# Altium PCB xbw.PcbDoc
Units mm, origin at the board's own origin, x right, y up, seen from the top; angles counter-clockwise.
Board outline 80 x 36 mm, 2 copper layers (Top Layer, Bottom Layer); 50 components, 49 nets, 227 pads, 269 vias.
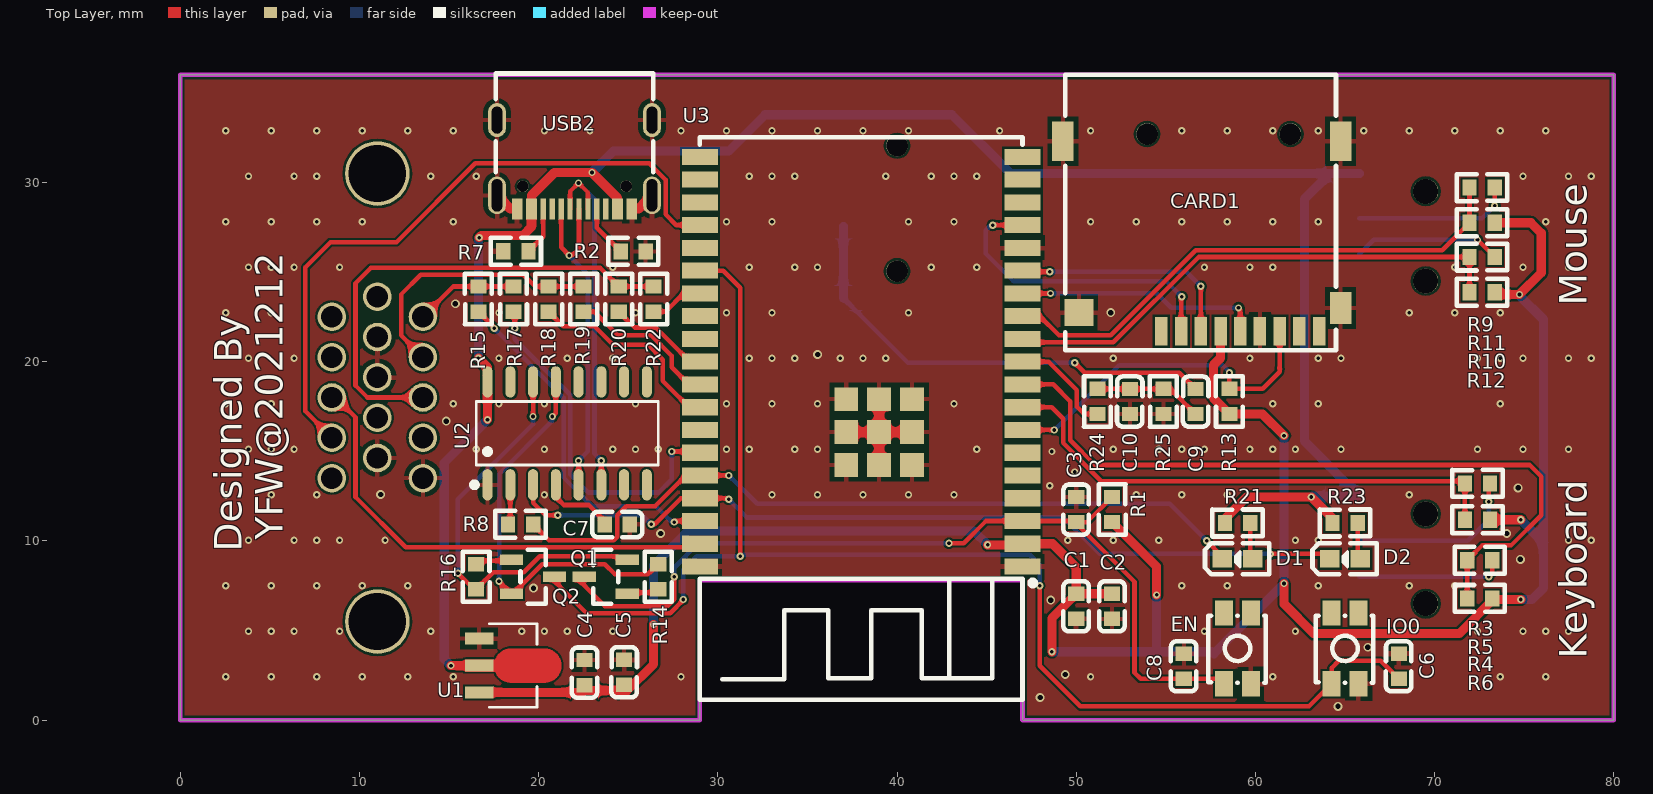
[diagram p0: Top Layer view]
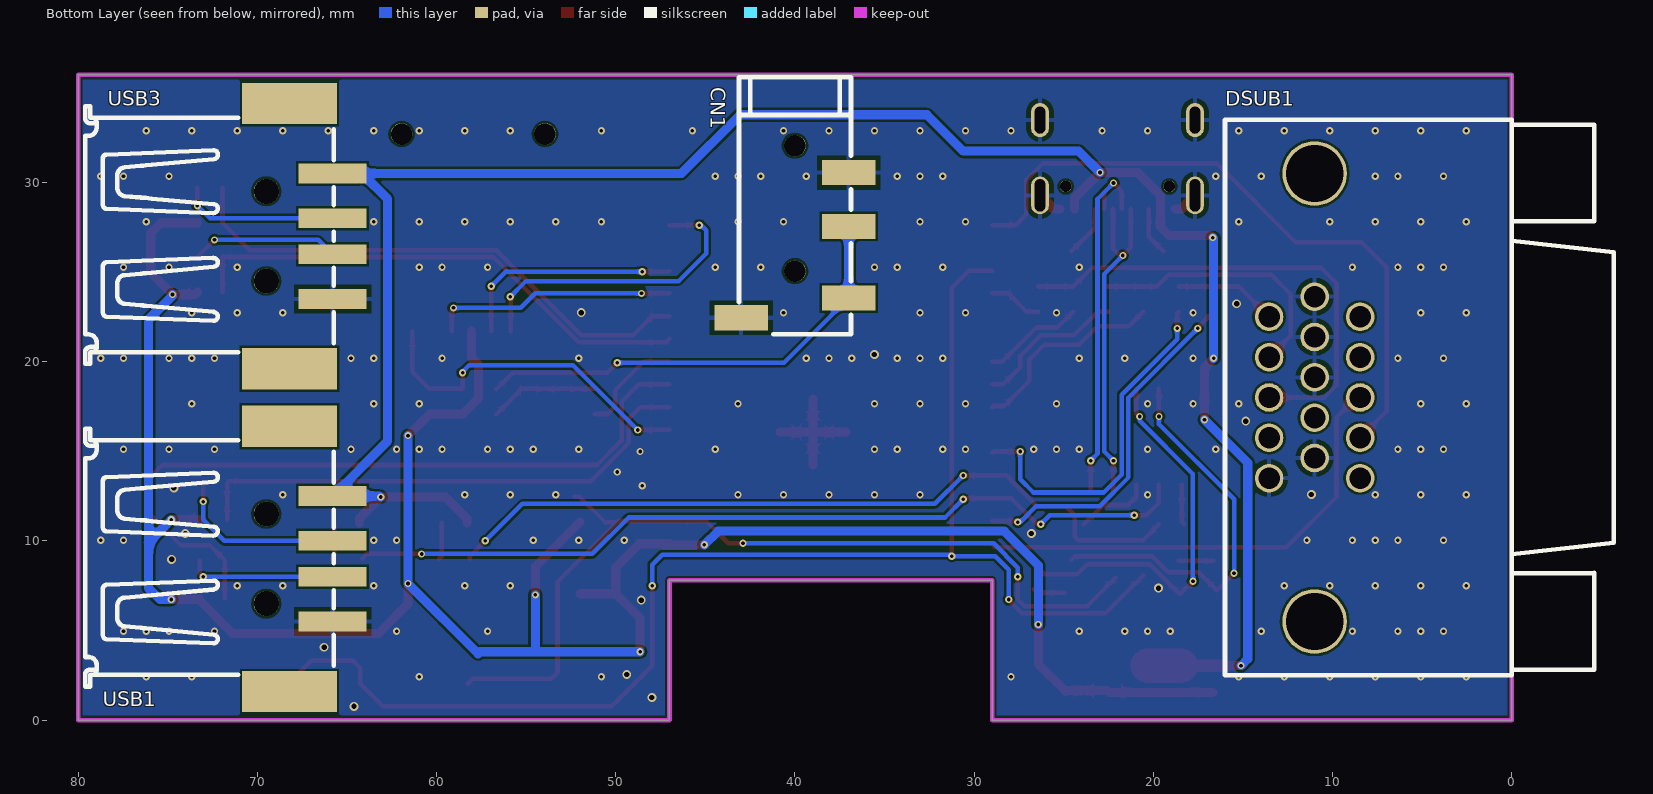
[diagram p1: Bottom Layer view, seen from below]
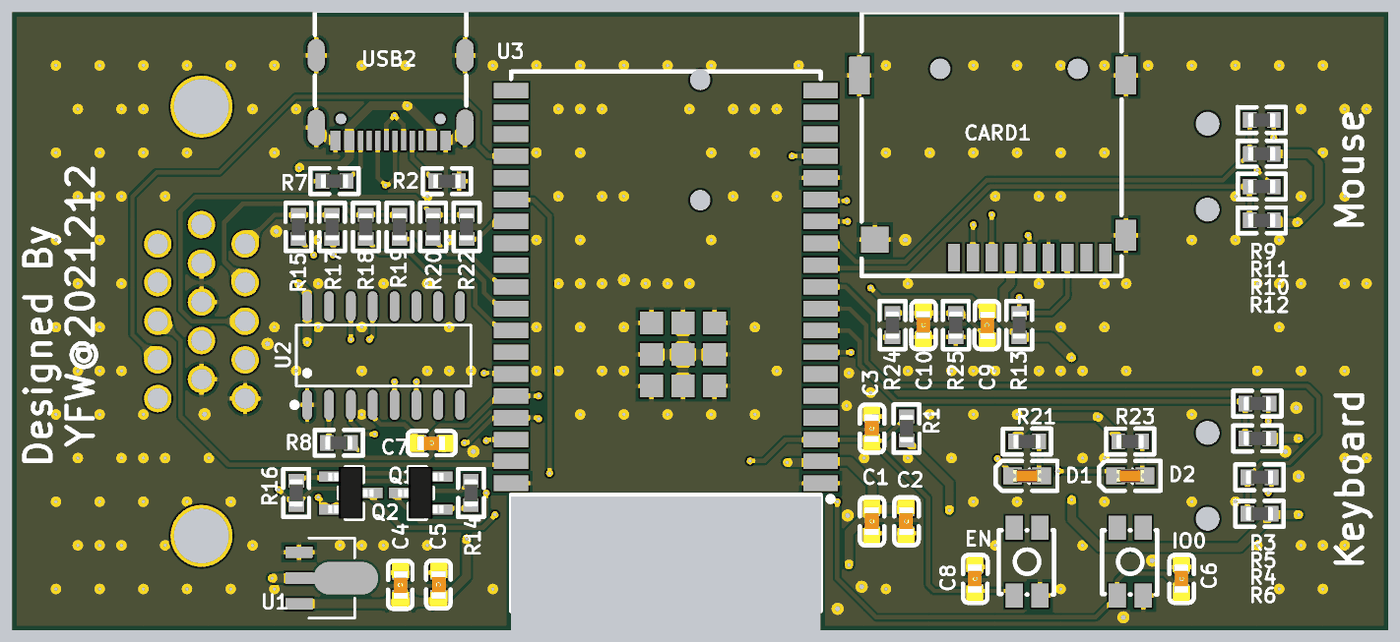
[diagram p2: 3D render of the assembled board from above, using the file's embedded part models]

## Layer stack, top to bottom
Top Solder: solder mask 0.0102, Solder Resist, Dk 3.5
Top Layer: signal copper 0.0356
Dielectric 1: dielectric 0.32, FR-4, Dk 4.8
Bottom Layer: signal copper 0.0356
Bottom Solder: solder mask 0.0102, Solder Resist, Dk 3.5

## Board outline
0,0 0,36 80,36 80,0 47,0 47,7.8 29,7.8 29,0

## Design rules (kind name [scope] priority, off if disabled: settings)
Clearance [All] p1: gap=0.127 ignorepadtopadclearanceinfootprint=FALSE except(0: Arc-Hole Track-Hole SMDPad-Hole THPad-Hole Via-Hole Fill-Hole Poly-Hole Region-Hole Text-Hole)
PolygonConnect [All] p1: thpad.connectstyle=Relief thpad.reliefconductorwidth=0.254 thpad.reliefentries=4 thpad.polygonreliefangle="90 Angle" thpad.airgapwidth=0.254 smdpad.connectstyle=Relief smdpad.reliefconductorwidth=0.254 smdpad.reliefentries=4 smdpad.polygonreliefangle="90 Angle" smdpad.airgapwidth=0.254 via.connectstyle=Direct via.reliefconductorwidth=0.254 via.reliefentries=4 via.polygonreliefangle="90 Angle" via.airgapwidth=0.254
RoutingVias [All] p1: holewidth=0.203 width=0.406 viastyle="Through Hole" minholewidth=0.152 minwidth=0.305 maxholewidth=0.711 maxwidth=1.27
SolderMaskExpansion [All] p1: expansion=0.102
Width [All] p1: maxlimit=1.016 minlimit=0.152 preferedwidth=0.152 minimp=50.000000 maximp=50.000000 favimp=50.000000
30 further rules are at their usual default settings.

## Components (designator, comment, footprint, x,y, rotation, side; value= is the part's Value field where it differs from the comment)
C1 "100nF" C0603 50,6.35 r90 top
C2 "10uF" C0603 52,6.35 r90 top
C3 "10uF" C0603 50,11.75 r90 top
C4 "10uF" C0603 22.549,2.65 r270 top
C5 "100nF" C0603 24.765,2.667 r270 top
C6 "100nF" C0603 68,3 r90 top
C7 "100nF" C0603 24.384,10.922 r180 top
C8 "100nF" C0603 56,3 r90 top locked
C9 "10uF" C0603 56.657,17.776 r270 top
C10 "100nF" C0603 52.993,17.778 r90 top
CARD1 "THD2528-11SD-GF" TF-SMD_THD2528-11SD-GF 57,27 r180 top locked
CN1 "PJ-320D" AUDIO-SMD_PJ-320D 40,26.5 r180 bottom locked
D1 "LED" LED-0603 59,9 r0 top
D2 "LED" LED-0603 65,9 r0 top
DSUB1 "VGA-002" D-SUB-TH_VGA-002 11,18 r90 bottom locked
EN "TS-1071SA-A3B3-D4" KEY-SMD_4P-L3.5-W3.0-P1.40-LS4.6 59,4 r90 top locked (schematic designator SW2)
IO0 "TS-1071SA-A3B3-D4" KEY-SMD_4P-L3.5-W3.0-P1.40-LS4.6 65,4 r90 top (schematic designator SW1)
Q1 "S8050" SOT-23_L2.9-W1.3-P0.95-LS2.4-BR 23.749,8 r0 top
Q2 "S8050" SOT-23_L2.9-W1.3-P0.95-LS2.4-BR 19.685,8 r180 top
R1 "10K" R0603 52,11.75 r90 top
R2 "5.1K" R0603 25.273,26.157 r0 top
R3 "120" R0603 72.39,13.208 r180 top
R4 "120" R0603 72.517,8.917 r180 top
R5 "10K" R0603 72.39,11.176 r0 top
R6 "10K" R0603 72.517,6.791 r180 top
R7 "5.1K" R0603 18.731,26.162 r180 top
R8 "1K" R0603 18.988,10.922 r0 top
R9 "120" R0603 72.644,29.718 r180 top
R10 "120" R0603 72.644,25.842 r180 top
R11 "10K" R0603 72.644,27.751 r0 top
R12 "10K" R0603 72.644,23.876 r180 top
R13 "10K" R0603 58.547,17.78 r90 top
R14 "12K" R0603 26.67,8 r270 top
R15 "400" R0603 16.637,23.495 r270 top
R16 "12K" R0603 16.51,8 r90 top
R17 "800" R0603 18.593,23.495 r270 top
R18 "400" R0603 20.554,23.495 r270 top
R19 "800" R0603 22.51,23.495 r270 top
R20 "400" R0603 24.465,23.495 r270 top
R21 "1K" R0603 59,11 r180 top
R22 "800" R0603 26.416,23.495 r270 top
R23 "1K" R0603 65,11 r180 top
R24 "270" R0603 51.181,17.78 r270 top
R25 "150" R0603 54.862,17.78 r270 top
U1 "ME6211A33PG-N" SOT-89_L4.5-W2.5-P1.50-LS4.2-BR 18.034,3.048 r180 top
U2 "CH340C" SOP-16_L10.0-W3.9-P1.27-LS6.0-BL 21.59,16 r0 top
U3 "ESP32-WROVER-E(4MB)_C701347" WIFI-SMD_ESP32-WROVER-E 38,20 r180 top locked
USB1 "U-USBAM04P-F000" USB-A-SMD_U-USBAM04P-F000 67,9 r270 bottom locked
USB2 "TYPEC-304J-BCP16" USB-C-SMD_TYPEC-304J-BCP16 22,31 r180 top locked
USB3 "U-USBAM04P-F000" USB-A-SMD_U-USBAM04P-F000 67,27 r270 bottom locked

## Footprints (in the part's own frame and the unit in brackets; to place one, negate y for a bottom-side part, rotate by r counter-clockwise, add the part's x,y. Pads: shape width x height; smd on the part's side, far side on the other; paste and mask are expansions set on the pad)
AUDIO-SMD_PJ-320D [mm]
  rect 3x1.4 smd: 1(-3,-4.05) 2(3,4.05) 3(3,1.05) 4(3,-2.95)
  round 1.2 hole 1.2 unplated: ""(0,-1.45) ""(0,5.55)
  silkscreen extent -3.12,-4.98 3.13,9.37
C0603 [mm]
  rect 0.8x0.9 smd: 1(-0.7,0) 2(0.7,0)
  silkscreen extent -1.4,-0.7 1.4,0.72, body extent -1.29,-0.47 1.31,0.53, height 0.89
D-SUB-TH_VGA-002 [mil]
  round 62.7 hole 47: 1(177.16,100) 2(88.58,100) 3(0,100) 4(-88.58,100) 5(-177.16,100) 6(221.46,0) 7(132.87,0) 8(44.29,0) 9(-44.29,0) 10(-132.87,0) 11(177.16,-100) 12(88.58,-100) 13(0,-100) 14(-88.58,-100) 15(-177.16,-100)
  round 141.7 hole 126: 16(492.13,0) 17(-492.13,0)
  silkscreen extent -610,-657 610,197
KEY-SMD_4P-L3.5-W3.0-P1.40-LS4.6 [mm]
  rect 1.4x1 smd: 1(-1.975,0.75) 2(1.975,0.75) 3(-1.975,-0.75) 4(1.975,-0.75)
  silkscreen extent -1.91,-1.57 1.83,1.64
LED-0603 [mil]
  rect 43x39 smd: 1(33.5,0) 2(-33.5,0)
  silkscreen extent -72,-34 70,34, body extent -32,-16 32,16, height 24
R0603 [mm]
  rect 0.8x0.9 smd: 1(-0.7,0) 2(0.7,0)
  silkscreen extent -1.4,-0.75 1.4,0.76, body extent -0.8,-0.4 0.8,0.4, height 0.38
SOP-16_L10.0-W3.9-P1.27-LS6.0-BL [mm]
  oval 0.56x1.745 smd: 1(-4.445,-2.873) 2(-3.175,-2.873) 3(-1.905,-2.873) 4(-0.635,-2.873) 5(0.635,-2.873) 6(1.905,-2.873) 7(3.175,-2.873) 8(4.445,-2.873) 9(4.445,2.873) 10(3.175,2.873) 11(1.905,2.873) 12(0.635,2.873) 13(-0.635,2.873) 14(-1.905,2.873) 15(-3.175,2.873) 16(-4.445,2.873)
  silkscreen extent -5.33,-3.02 5.08,1.77
SOT-23_L2.9-W1.3-P0.95-LS2.4-BR [mm]
  rect 1.3x0.6 smd: 1(1.2,-0.95) 2(1.2,0.95) 3(-1.2,0)
  silkscreen extent -0.7,-1.5 0.7,1.5, body extent -1.32,-1.5 1.32,1.5, height 1.08
SOT-89_L4.5-W2.5-P1.50-LS4.2-BR [mm]
  rect 1.575x0.672 smd: 1(1.356,-1.5) 2(1.356,0) 3(1.356,1.5)
  round 0 smd: 2(-1.356,0.009)
  Top Layer region: -2.283,0.959 -0.429,0.959 -0.385,0.958 -0.34,0.955 -0.296,0.949 -0.252,0.942 -0.208,0.933 -0.165,0.921 -0.123,0.908 -0.081,0.893 -0.04,0.875 0,0.856 0.04,0.835 0.078,0.812 0.115,0.788 0.151,0.761 0.185,0.733 0.219,0.704 0.251,0.673 0.281,0.64 0.31,0.606 0.337,0.571 0.362,0.534 0.386,0.497 0.408,0.458 0.428,0.418 0.447,0.339 2.144,0.339 2.144,-0.321 0.447,-0.321 0.428,-0.401 0.408,-0.44 0.386,-0.479 0.362,-0.517 0.337,-0.553 0.31,-0.588 0.281,-0.622 0.251,-0.655 0.219,-0.686 0.185,-0.716 0.151,-0.744 0.115,-0.77 0.078,-0.795 0.04,-0.818 0,-0.839 -0.04,-0.858 -0.081,-0.875 -0.123,-0.89 -0.165,-0.904 -0.208,-0.915 -0.252,-0.925 -0.296,-0.932 -0.34,-0.937 -0.385,-0.94 -0.429,-0.941 -2.283,-0.941 -2.328,-0.94 -2.372,-0.937 -2.416,-0.932 -2.46,-0.925 -2.504,-0.915 -2.547,-0.904 -2.589,-0.89 -2.631,-0.875 -2.672,-0.858 -2.713,-0.839 -2.752,-0.818 -2.79,-0.795 -2.827,-0.77 -2.863,-0.744 -2.898,-0.716 -2.931,-0.686 -2.963,-0.655 -2.993,-0.622 -3.022,-0.588 -3.049,-0.553 -3.075,-0.517 -3.098,-0.479 -3.12,-0.44 -3.141,-0.401 -3.159,-0.36 -3.175,-0.318 -3.189,-0.276 -3.202,-0.233 -3.212,-0.19 -3.22,-0.146 -3.227,-0.102 -3.231,-0.058 -3.233,-0.013 -3.233,0.031 -3.231,0.076 -3.227,0.12 -3.22,0.164 -3.212,0.208 -3.202,0.251 -3.189,0.294 -3.175,0.336 -3.159,0.377 -3.141,0.418 -3.12,0.458 -3.098,0.497 -3.075,0.534 -3.049,0.571 -3.022,0.606 -2.993,0.64 -2.963,0.673 -2.931,0.704 -2.898,0.733 -2.863,0.761 -2.827,0.788 -2.79,0.812 -2.752,0.835 -2.713,0.856 -2.672,0.875 -2.631,0.893 -2.589,0.908 -2.547,0.921 -2.504,0.933 -2.46,0.942 -2.416,0.949 -2.372,0.955 -2.328,0.958
  silkscreen extent -1.87,-2.33 0.78,2.33
TF-SMD_THD2528-11SD-GF [mm]
  rect 0.7x1.6 smd: 1(2.25,5.3) 2(1.15,5.3) 3(0.05,5.3) 4(-1.05,5.3) 5(-2.15,5.3) 6(-3.25,5.3) 7(-4.35,5.3) 8(-5.45,5.3) 9(-6.55,5.3)
  rect 1.2x1.8 smd: 10(-7.75,4)
  rect 1.2x2.2 smd: 11(-7.75,-5.3) 12(7.75,-5.3)
  rect 1.6x1.5 smd: 13(6.85,4.25)
  round 1.2 hole 1.2 unplated: ""(-4.95,-5.7) ""(3.05,-5.7)
  silkscreen extent -7.49,-9 7.62,6.36
USB-A-SMD_U-USBAM04P-F000 [mm]
  rect 1.1x3.8 smd: 1(-3.5,1.2) 2(-1,1.2) 3(1,1.2) 4(3.5,1.2)
  rect 2.3x5.3 smd: SH1(7.4,-1.2) SH2(-7.4,-1.2)
  round 1.4 hole 1.4 unplated: ""(-2.5,-2.5) ""(2.5,-2.5)
  silkscreen extent -7.25,-12.61 7.13,1.27
USB-C-SMD_TYPEC-304J-BCP16 [mm]
  oval 1x2.1 hole 0.6 slot 1.8 at 90 deg: 13(-4.325,1.719) 14(4.325,1.719)
  oval 1x1.9 hole 0.6 slot 1.5 at 90 deg: 15(-4.325,-2.481) 16(4.325,-2.481)
  rect 0.6x1.15 smd: A1B12(-3.2,2.481) A4B9(-2.4,2.481) B1A12(3.2,2.481) B4A9(2.4,2.481)
  rect 0.3x1.15 smd: A5(-1.25,2.481) A6(-0.25,2.481) A7(0.25,2.481) A8(1.25,2.481) B5(1.75,2.481) B6(0.75,2.481) B7(-0.75,2.481) B8(-1.75,2.481)
  round 0.65 hole 0.65 unplated: ""(-2.89,1.219) ""(2.89,1.219)
  silkscreen extent -4.4,-5.08 4.4,0.44
WIFI-SMD_ESP32-WROVER-E [mm]
  rect 2x0.9 smd: 1(-9,11.43) 2(-9,10.16) 3(-9,8.89) 4(-9,7.62) 5(-9,6.35) 6(-9,5.08) 7(-9,3.81) 8(-9,2.54) 9(-9,1.27) 10(-9,0) 11(-9,-1.27) 12(-9,-2.54) 13(-9,-3.81) 14(-9,-5.08) 15(-9,-6.35) 16(-9,-7.62) 17(-9,-8.89) 18(-9,-10.16) 19(-9,-11.43) 20(9,-11.43) 21(9,-10.16) 22(9,-8.89) 23(9,-7.62) 24(9,-6.35) 25(9,-5.08) 26(9,-3.81) 27(9,-2.54) 28(9,-1.27) 29(9,0) 30(9,1.27) 31(9,2.54) 32(9,3.81) 33(9,5.08) 34(9,6.35) 35(9,7.62) 36(9,8.89) 37(9,10.16) 38(9,11.43)
  rect 1.33x1.33 smd: 39(-2.835,5.765) 39(-2.835,2.095) 39(-2.835,3.93) 39(-1,5.765) 39(-1,3.93) 39(-1,2.095) 39(0.835,3.93) 39(0.835,2.095) 39(0.835,5.765)
  silkscreen extent -9.72,-12.53 9,18.87

## Part data
C1 C2 C3 C4 C5 C6 C7 C8 C9 C10: library part CAP_0603, BOM_Manufacturer=YAGEO, BOM_Manufacturer Part=CC0603GRNPO9BN200, BOM_Supplier=LCSC, BOM_Supplier Part=C325469, Contributor=LCSC, nameAlias=Capacitance, spicePre=C, spiceSymbolName=CC0603GRNPO9BN200
CARD1: BOM_JLCPCB Part Class="Extended Part", BOM_Manufacturer=THD, BOM_Manufacturer Part=THD2528-11SD-GF, BOM_Supplier=LCSC, BOM_Supplier Part=C283232, Contributor=LCSC, spicePre=C, spiceSymbolName=THD2528-11SD-GF
CN1: BOM_JLCPCB Part Class="Extended Part", BOM_Manufacturer="SHOU HAN", BOM_Manufacturer Part=PJ-320D, BOM_Supplier=LCSC, BOM_Supplier Part=C431535, Contributor=LCSC, spicePre=C, spiceSymbolName=PJ-320D
D1 D2: library part LED-Y, BOM_Manufacturer Part=?, nameAlias=Model, spicePre=D, spiceSymbolName=LED
DSUB1: BOM_JLCPCB Part Class="Extended Part", BOM_Manufacturer=BOOMELE, BOM_Manufacturer Part=VGA-002, BOM_Supplier=LCSC, BOM_Supplier Part=C138387, spicePre=D, spiceSymbolName=VGA-002
EN IO0: BOM_JLCPCB Part Class="Extended Part", BOM_Manufacturer=Yuandi, BOM_Manufacturer Part=TS-1071SA-A3B3-D4, BOM_Supplier=LCSC, BOM_Supplier Part=C498309, Contributor=LCSC, spicePre=S, spiceSymbolName=TS-1071SA-A3B3-D4
Q1 Q2: BOM_Manufacturer=GreenPower, BOM_Manufacturer Part=S8050, BOM_Supplier=LCSC, BOM_Supplier Part=C414195, Contributor=LCSC, spicePre=Q, spiceSymbolName=S8050_C414195
R1 R2 R3 R4 R5 R6 R7 R8 R9 R10 R11 R12 R13 R14 R15 R16 R17 R18 R19 R20 R21 R22 R23 R24 R25: library part RES_0603, BOM_Manufacturer=LIZ, BOM_Manufacturer Part=CR0603JA0301G, BOM_Supplier=LCSC, BOM_Supplier Part=C101323, nameAlias="Resistance (Ohms)", spicePre=R, spiceSymbolName=CR0603JA0301G
U1: BOM_JLCPCB Part Class="Extended Part", BOM_Manufacturer="Nanjing Micro One Elec", BOM_Manufacturer Part=ME6211A33PG-N, BOM_Supplier=LCSC, BOM_Supplier Part=C236673, Contributor=LCSC, spicePre=U, spiceSymbolName=ME6211A33PG-N
U2: BOM_JLCPCB Part Class="Extended Part", BOM_Manufacturer=WCH, BOM_Manufacturer Part=CH340C, BOM_Supplier=LCSC, BOM_Supplier Part=C84681, spicePre=U, spiceSymbolName=CH340C
U3: BOM_JLCPCB Part Class="Extended Part", BOM_Manufacturer="Espressif Systems", BOM_Manufacturer Part=ESP32-WROVER-E(4MB), BOM_Supplier=LCSC, BOM_Supplier Part=C701347, Contributor=LCSC, spicePre=U, spiceSymbolName=ESP32-WROVER-E(4MB)_C701347
USB1 USB3: BOM_JLCPCB Part Class="Extended Part", BOM_Manufacturer="Shenzhen Cankemeng", BOM_Manufacturer Part=U-USBAM04P-F000, BOM_Supplier=LCSC, BOM_Supplier Part=C386738, Contributor=LCSC, spicePre=U, spiceSymbolName=U-USBAM04P-F000
USB2: BOM_JLCPCB Part Class="Extended Part", BOM_Manufacturer=XUNPU(讯普, BOM_Manufacturer Part=TYPEC-304J-BCP16, BOM_Supplier=LCSC, BOM_Supplier Part=C2835315, Contributor=LCSC, spicePre=U, spiceSymbolName=TYPEC-304J-BCP16

## Via types
v1: diameter 0.406, hole 0.203, Top Layer to Bottom Layer, 254 vias
v2: diameter 0.5, hole 0.3, Top Layer to Bottom Layer, 15 vias

## Nets (pads, with @x,y where several pads share a name; then routed paths per layer and width w, separated by ;. In a path a pad name is that pad's centre, name@x,y a point inside that pad or via, vN(x,y) a via of type N, cw(c..) or ccw(c..) an arc to the next point about the centre after c; other vN are vias at no path point)
+3V3: C1.2 C2.2 C4.2 C5.2 CARD1.4 R1.1 R5.2 R6.1 R11.2 R12.1 R13.1 U1.3 U3.2 | length 134.5
  Top Layer w0.254: 22.447,1.548 C4.2@22.549,1.65
  Top Layer w0.508: U1.3 22.447,1.548 ; C4.2@22.549,1.65 C5.2@24.891,1.65 ; C5.2@24.892,1.597 26.416,3.121 v1(26.416,5.334) ; v1(45.052,9.779) U3.2@47.371,9.779 ; U3.2 48.672,9.84 50,8.512 C1.2 C2.2 ; v1(48.641,3.81) 48.641,5.679 49.169,6.207 ; 49.169,6.208 C1.2@49.784,6.823 ; R1.1 54.483,8.567 v1(54.483,6.985) ; CARD1.4 58.05,20.204 57.658,19.812 57.658,17.969 R13.1 60.39,17.08 v1(61.595,15.875) ; v1(61.595,7.62) 61.595,6.477 63.246,4.826 71.374,4.826 R6.1@73.279,6.731 ; R5.2 v1(74.803,11.176) ; R6.1 73.277,6.731 R6.1@73.279,6.731 ; R12.1 73.471,23.749 v1(74.73,23.749) 75.946,24.965 75.946,27.178 75.373,27.751 R11.2 ; v1(74.803,6.731) R6.1@73.279,6.731
  Bottom Layer w0.508: v1(26.416,5.334) 26.416,8.636 28.321,10.541 44.29,10.541 v1(45.052,9.779) ; v1(48.641,3.81) 54.61,3.81 ; v1(54.483,6.985) 54.483,3.937 54.61,3.81 ; v1(61.595,15.875) v1(61.595,7.62) 57.675,3.7 57.565,3.81 54.61,3.81 ; v1(74.73,23.749) 74.73,23.695 76.073,22.352 76.073,9.906 ; v1(74.803,6.731) 75.438,6.731 76.073,7.366 76.073,9.906 ; v1(74.803,11.176) 76.073,9.906
AUDIO: C9.1 CN1.3 CN1.4 | length 25.8
  Top Layer w0.254: v1(49.911,19.939) 50.47,19.38 55.753,19.38 C9.1
  Bottom Layer w0.254: CN1.4 40.611,19.939 v1(49.911,19.939)
  Bottom Layer w0.508: CN1.4 CN1.3
BLUE0: R22.2 U3.26 | length 3
  Top Layer w0.254: R22.2 27.074,22.795 28.089,23.81 U3.26
BLUE1: R20.2 U3.29 | length 5.7
  Top Layer w0.254: R20.2 25.354,21.906 26.542,21.906 28.448,20 U3.29
DTR: Q2.2 R14.1 U2.13 | length 22.4
  Top Layer w0.254: v1(17.788,7.747) Q2.2 18.543,7.05 20.193,8.7 23.685,8.7 24.257,8.128 26.098,8.128 R14.1 ; v1(20.766,16.942) 20.955,17.13 U2.13@20.955,18.494
  Bottom Layer w0.254: v1(17.788,7.747) 17.788,13.739 17.796,13.731 20.766,16.701 v1(20.766,16.942)
ESP_EN: C3.1 C8.1 EN.1 Q1.3 R1.2 U3.3 | length 49.4
  Top Layer w0.254: Q1.3@22.107,7.94 23.698,6.35 27.178,6.35 27.559,6.731 v1(27.559,8.001) ; v1(42.901,9.864) 43.713,9.864 44.959,11.11 U3.3 49.85,11.11 53.25,7.71 53.25,2.641 53.591,2.3 C8.1 57.975,2.3 EN.1 ; C3.1 50.6,11.05 R1.2 R1.2@52.32,12.45
  Bottom Layer w0.254: v1(27.559,8.001) 27.559,8.509 28.914,9.864 v1(42.901,9.864)
ESP_GPIO0: C6.1 IO0.1 Q2.3 U3.25 | length 77.1
  Top Layer w0.254: Q2.3@20.571,8.068 22.671,5.969 27.336,5.969 v1@28.082,6.716 ; U3.25 30.292,25.08 31.242,24.13 v1(31.242,9.144) ; v1(47.966,7.493) 47.966,3.021 50.226,0.762 62.987,0.762 IO0.1 64.25,2.909 64.643,3.302 66.998,3.302 C6.1
  Bottom Layer w0.254: v1(28.067,6.731) 28.067,8.382 28.829,9.144 v1(31.242,9.144) 31.327,9.229 47.413,9.229 47.966,8.676 v1(47.966,7.493)
ESP_GPIO2: U3.24
ESP_GPIO12: CARD1.3 U3.14 | length 12.8
  Top Layer w0.254: U3.14 47.061,25.019 v1(48.514,25.019) ; CARD1.3 v1(56.95,24.203)
  Bottom Layer w0.254: v1(48.514,25.019) 56.072,25.019 56.103,25.05 v1(56.95,24.203)
ESP_GPIO13: CARD1.2 U3.16 | length 17.3
  Top Layer w0.254: v1(45.339,27.62) U3.16 ; CARD1.2 55.85,23.595 v1(55.88,23.625)
  Bottom Layer w0.254: v1(45.339,27.62) 45.24,27.62 44.958,27.338 44.958,26.035 46.493,24.5 55.005,24.5 v1(55.88,23.625)
ESP_GPIO14: CARD1.5 U3.13 | length 13.7
  Top Layer w0.254: U3.13 v1(48.563,23.81) ; v1(59.055,23) 59.15,22.905 CARD1.5
  Bottom Layer w0.254: v1(48.563,23.81) 54.485,23.81 55.295,23 v1(59.055,23)
ESP_GPIO15: DSUB1.14 U3.23 | length 37.1
  Top Layer w0.254: DSUB1.14 6.985,17.225 6.985,25.273 8.382,26.67 12.065,26.67 16.459,31.064 26.159,31.064 27.079,30.144 27.079,28.227 27.686,27.62 U3.23
ESP_GPIO16: U3.27
ESP_GPIO17: U3.28
ESP_GPIO18: R19.2 U3.30 | length 8.5
  Top Layer w0.254: R19.2 23.106,22.795 24.43,21.471 26.281,21.471 27.432,20.32 27.432,19.684 28.386,18.73 U3.30
ESP_GPIO19: R18.2 U3.31 | length 11.3
  Top Layer w0.254: R18.2 21.378,21.971 23.114,21.971 24.13,20.955 26.071,20.955 26.924,20.102 26.924,18.923 28.321,17.526 28.934,17.526 U3.31
ESP_GPIO21: R17.2 U3.33 | length 19.9
  Top Layer w0.254: R17.2 18.669,22.719 v1(18.669,21.856) ; v1(27.432,14.986) 28.934,14.986 U3.33
  Bottom Layer w0.254: v1(18.669,21.856) 18.669,21.252 21.768,18.153 21.768,13.703 22.771,12.7 26.69,12.7 27.432,13.442 v1(27.432,14.986)
ESP_GPIO22: R15.2 U3.36 | length 19.9
  Top Layer w0.254: R15.2 17.526,21.906 v1(17.526,21.856) ; v1(27.559,11.049) 27.62,11.11 U3.36
  Bottom Layer w0.254: v1(17.526,21.856) 21.387,17.996 21.387,13.538 22.99,11.935 26.546,11.935 27.432,11.049 v1(27.559,11.049)
ESP_GPIO23: DSUB1.13 U3.37 | length 26.7
  Top Layer w0.254: DSUB1.13 8.67,18 9.779,16.891 9.779,12.446 12.573,9.652 28.812,9.652 U3.37
ESP_GPIO25: R24.2 U3.10 | length 5.9
  Top Layer w0.254: U3.10 48.453,20 50.038,18.415 50.038,17.474 50.432,17.08 R24.2
ESP_GPIO26: R10.2 R12.2 U3.11 | length 29
  Top Layer w0.254: U3.11 47.188,21.082 52.07,21.082 56.83,25.842 R10.2 R12.2
ESP_GPIO27: R9.2 R11.1 U3.12 | length 31.9
  Top Layer w0.254: U3.12 47.966,22.54 49.035,21.471 51.92,21.471 56.672,26.223 70.416,26.223 R11.1 ; R11.1 R9.2 R11.1
ESP_GPIO32: R3.2 R5.1 U3.8 | length 29.2
  Top Layer w0.254: U3.8 48.63,17.46 49.276,16.813 49.276,15.463 51.404,13.335 R3.2@71.628,13.335 ; R5.1 R3.2
ESP_GPIO33: R4.2 R6.2 U3.9 | length 41.8
  Top Layer w0.254: U3.9 48.707,18.73 49.657,17.78 49.657,15.621 51.043,14.235 75.3,14.235 75.946,13.589 75.946,11.43 74.26,9.744 72.644,9.744 R4.2 R6.2
ESP_GPIO34: U3.6
ESP_GPIO35: CARD1.7 R13.2 U3.7 | length 19.6
  Top Layer w0.254: U3.7 v1(48.768,16.19) ; v1(58.547,19.38) R13.2 60.399,18.48 61.35,19.431 CARD1.7
  Bottom Layer w0.254: v1(48.768,16.19) 52.39,19.812 58.166,19.812 v1@58.547,19.431
ESP_RX: D1.2 R8.2 U3.34 | length 43
  Top Layer w0.254: R8.2 20.577,10.033 24.193,10.033 24.384,10.224 24.384,11.431 24.891,11.938 26.495,11.938 28.206,13.65 U3.34 v1(30.607,13.65) ; v1(57.277,10) 58.149,9.128 D1.2
  Bottom Layer w0.254: v1(30.607,13.65) 32.192,12.065 55.212,12.065 v1(57.277,10)
ESP_TX: D2.2 U2.3 U3.35 | length 48
  Top Layer w0.254: U2.3 19.685,12.134 20.389,11.43 v1(21.07,11.43) ; v1(26.289,10.922) 26.481,10.922 27.939,12.38 U3.35 30.546,12.38 v1(30.607,12.319) ; v1(60.833,9.271) 63.878,9.271 D2.2
  Bottom Layer w0.254: v1(21.07,11.43) 25.781,11.43 v1(26.289,10.922) ; v1(30.607,12.319) 31.623,11.303 49.276,11.303 51.308,9.271 v1(60.833,9.271)
GND: C1.1 C2.1 C3.2 C4.1 C5.1 C6.2 C7.1 C8.2 C10.1 CARD1.6 CARD1.10 CARD1.11 CARD1.12 CARD1.13 CN1.1 CN1.2 DSUB1.5 DSUB1.6 DSUB1.7 DSUB1.8 DSUB1.10 EN.3 IO0.3 R2.2 R7.2 R25.2 U1.1 U2.1 U3.1 U3.15 U3.38 U3.39 USB1.4 USB2.13 USB2.14 USB2.15 USB2.16 USB2.A1B12 USB2.B1A12 USB3.4 | length 10.2
  Top Layer w0.508: USB2.14 18.438,28.519 USB2.B1A12 ; USB2.A1B12 25.562,28.519 USB2.13 ; U3.39@37.165,16.07 U3.39@39,16.07 ; U3.39@39,14.235 U3.39@39,16.07 ; U3.39@39,17.905 U3.39@39,16.07 ; U3.39@40.835,16.07 U3.39@39,16.07
  other v1: 2.54,2.413 5.08,2.413 7.62,2.413 10.16,2.413 12.7,2.413 15.24,2.413 27.94,2.413 50.8,2.413 60.96,2.413 73.66,2.413 76.2,2.413 3.81,4.953 5.08,4.953 6.35,4.953 8.89,4.953 13.97,4.953 19.05,4.953 20.32,4.953 21.59,4.953 24.13,4.953 57.15,4.953 62.23,4.953 72.39,4.953 74.93,4.953 76.2,4.953 77.47,4.953 2.54,7.493 5.08,7.493 7.62,7.493 10.16,7.493 12.7,7.493 55.88,7.493 58.42,7.493 63.5,7.493 68.58,7.493 71.12,7.493 3.81,10.033 6.35,10.033 7.62,10.033 8.89,10.033 11.43,10.033 49.53,10.033 52.07,10.033 54.61,10.033 62.23,10.033 63.5,10.033 77.47,10.033 78.74,10.033 2.54,12.573 5.08,12.573 7.62,12.573 20.32,12.573 33.02,12.573 35.56,12.573 38.1,12.573 40.64,12.573 43.18,12.573 53.34,12.573 55.88,12.573 58.42,12.573 68.58,12.573 48.514,13.081 49.911,13.843 48.641,14.986 3.81,15.113 5.08,15.113 6.35,15.113 16.51,15.113 20.32,15.113 24.13,15.113 25.4,15.113 26.67,15.113 30.48,15.113 31.75,15.113 34.29,15.113 35.56,15.113 44.45,15.113 52.07,15.113 54.61,15.113 55.88,15.113 57.15,15.113 59.69,15.113 60.96,15.113 62.23,15.113 64.77,15.113 72.39,15.113 74.93,15.113 77.47,15.113 2.54,17.653 5.08,17.653 15.24,17.653 17.78,17.653 20.32,17.653 25.4,17.653 30.48,17.653 33.02,17.653 35.56,17.653 43.18,17.653 60.96,17.653 63.5,17.653 73.66,17.653 3.81,20.193 6.35,20.193 17.78,20.193 21.59,20.193 24.13,20.193 31.75,20.193 33.02,20.193 34.29,20.193 36.83,20.193 38.1,20.193 39.37,20.193 52.07,20.193 59.69,20.193 63.5,20.193 64.77,20.193 72.39,20.193 73.66,20.193 74.93,20.193 77.47,20.193 78.74,20.193 2.54,22.733 5.08,22.733 17.78,22.733 25.4,22.733 30.48,22.733 33.02,22.733 40.64,22.733 68.58,22.733 71.12,22.733 73.66,22.733 3.81,25.273 5.08,25.273 6.35,25.273 8.89,25.273 24.13,25.273 31.75,25.273 34.29,25.273 35.56,25.273 41.91,25.273 44.45,25.273 57.15,25.273 59.69,25.273 60.96,25.273 71.12,25.273 74.93,25.273 77.47,25.273 2.54,27.813 5.08,27.813 7.62,27.813 10.16,27.813 15.24,27.813 30.48,27.813 33.02,27.813 40.64,27.813 43.18,27.813 50.8,27.813 53.34,27.813 55.88,27.813 58.42,27.813 60.96,27.813 63.5,27.813 76.2,27.813 3.81,30.353 6.35,30.353 7.62,30.353 13.97,30.353 16.51,30.353 31.75,30.353 33.02,30.353 34.29,30.353 39.37,30.353 41.91,30.353 43.18,30.353 44.45,30.353 74.93,30.353 77.47,30.353 78.74,30.353 2.54,32.893 5.08,32.893 7.62,32.893 10.16,32.893 12.7,32.893 15.24,32.893 20.32,32.893 22.86,32.893 27.94,32.893 30.48,32.893 33.02,32.893 35.56,32.893 38.1,32.893 40.64,32.893 45.72,32.893 50.8,32.893 55.88,32.893 58.42,32.893 60.96,32.893 63.5,32.893 66.04,32.893 68.58,32.893 71.12,32.893 73.66,32.893 76.2,32.893
  other v2: 64.605,0.762 47.988,1.257 49.385,2.54 66.276,4.064 48.577,6.691 19.708,7.366 74.785,8.969 26.809,10.414 74.023,10.414 11.181,12.584 74.658,12.961 14.843,16.683 35.565,20.403 51.925,22.733 15.347,23.233
NetC7_2: C7.2 U2.4 | length 4.2
  Top Layer w0.254: U2.4 20.955,12.446 21.4,12.001 22.794,12.001 C7.2@23.873,10.922
NetC9_2: C9.2 C10.2 R24.1 R25.1 | length 6.1
  Top Layer w0.254: R24.1 52.991,18.48 C10.2 54.86,18.478 R25.1 55.253,18.48 C9.2
NetD1_1: D1.1 R21.1 | length 2.1
  Top Layer w0.254: R21.1 59.7,9.151 D1.1
NetD2_1: D2.1 R23.1 | length 2.1
  Top Layer w0.254: R23.1 65.7,9.151 D2.1
NetDSUB1_1: DSUB1.1 R15.1 R17.1 | length 5.8
  Top Layer w0.254: DSUB1.1 15.235,24.195 R15.1 R17.1
NetDSUB1_2: DSUB1.2 R18.1 R19.1 | length 14.9
  Top Layer w0.254: DSUB1.2 12.319,21.471 12.319,23.749 13.419,24.849 19.148,24.849 19.802,24.195 R18.1 R19.1
NetDSUB1_3: DSUB1.3 R20.1 R22.1 | length 27.2
  Top Layer w0.254: DSUB1.3 10.448,18 9.779,18.669 9.779,24.384 10.625,25.23 23.43,25.23 R20.1 R22.1
NetQ1_1: Q1.1 R14.2 | length 1.8
  Top Layer w0.254: Q1.1@24.949,7.112 26.482,7.112 R14.2
NetQ2_1: Q2.1 R16.2 | length 2
  Top Layer w0.254: R16.2@16.637,8.89 Q2.1@18.612,8.89
NetR2_1: R2.1 USB2.A5 | length 2.9
  Top Layer w0.254: USB2.A5 23.25,27.48 R2.1
NetR3_1: R3.1 USB1.2 | length 9.8
  Top Layer w0.254: v1(73.025,12.192) 73.025,13.143 R3.1
  Bottom Layer w0.254: USB1.2 71.849,10 73.025,11.176 v1(73.025,12.192)
NetR4_1: R4.1 USB1.3 | length 8.2
  Top Layer w0.254: v1(73.025,8) 73.217,8.192 R4.1
  Bottom Layer w0.254: USB1.3 v1(73.025,8)
NetR7_1: R7.1 USB2.B5 | length 2.7
  Top Layer w0.254: R7.1 20.25,26.981 USB2.B5
NetR8_1: R8.1 U2.2 | length 2.3
  Top Layer w0.254: R8.1 18.415,11.049 U2.2
NetR9_1: R9.1 USB3.2 | length 8.9
  Top Layer w0.254: v1(73.344,28.702) R9.1
  Bottom Layer w0.254: USB3.2 72.642,28 v1(73.344,28.702)
NetR10_1: R10.1 USB3.3 | length 8.3
  Top Layer w0.254: v1(72.39,26.796) R10.1
  Bottom Layer w0.254: USB3.3 66.597,26.797 66.598,26.796 v1(72.39,26.796)
RTS: Q1.2 R16.1 U2.14 | length 22.4
  Top Layer w0.254: v1(15.494,8.194) 16.449,7.239 R16.1 17.465,8.255 19.177,8.255 20.066,9.144 24.373,9.144 Q1.2@24.567,8.95 ; v1(19.685,16.942) U2.14@19.685,18.494
  Bottom Layer w0.254: v1(15.494,8.194) 15.494,12.313 19.685,16.504 v1(19.685,16.942)
USB_+5V: R21.2 R23.2 U1.2 U2.16 USB1.1 USB2.A4B9 USB2.B4A9 USB3.1 | length 116.6
  Top Layer w0.508: v1@15.101,3.039 v1(15.104,3.039) 19.39,3.039 ; v1(16.637,20.193) 17.145,19.685 U2.16 v1(17.145,16.764) ; v1(16.678,26.924) 16.805,27.051 19.129,27.051 19.6,27.522 USB2.B4A9 19.6,29.273 20.883,30.556 v1(22.976,30.556) 24.4,29.132 USB2.A4B9 ; R21.2 58.3,11.242 59.504,12.446 v1(63.119,12.446) 64.3,11.265 R23.2
  Bottom Layer w0.508: v1(15.104,3.039) 14.732,3.411 14.732,14.351 v1(17.145,16.764) ; v1(16.637,20.193) 16.637,26.883 v1(16.678,26.924) ; v1(22.976,30.556) 24.17,31.75 30.607,31.75 32.639,33.782 43.053,33.782 46.335,30.5 USB3.1@64.155,30.5 ; v1(63.119,12.446) 63.173,12.5 USB1.1 62.738,15.562 62.738,29.083 USB3.1@64.155,30.5 ; USB3.1 USB3.1@64.155,30.5
USB_DN: U2.6 USB2.A7 USB2.B7 | length 21.1
  Top Layer w0.254: USB2.A7 21.75,29.5 v1(22.222,29.972) 22.75,29.444 USB2.B7 ; U2.6@23.495,12.748 v1(23.495,14.478)
  Bottom Layer w0.254: v1(22.222,29.972) 23.114,29.08 23.114,14.859 v1(23.495,14.478)
USB_DP: U2.5 USB2.A6 USB2.B6 | length 19.5
  Top Layer w0.254: USB2.B6 21.25,26.375 v1(21.698,25.927) 21.863,25.927 22.25,26.314 USB2.A6 ; U2.5@22.225,12.748 v1(22.225,14.478)
  Bottom Layer w0.254: v1(21.698,25.927) 22.733,24.892 22.733,14.986 v1(22.225,14.478)
pads on no net: CARD1. CARD1.1 CARD1.8 CARD1.9 CN1. DSUB1.4 DSUB1.9 DSUB1.11 DSUB1.12 DSUB1.15 DSUB1.16 DSUB1.17 EN.2 EN.4 IO0.2 IO0.4 U2.7 U2.8 U2.9 U2.10 U2.11 U2.12 U2.15 U3.4 U3.5 U3.17 U3.18 U3.19 U3.20 U3.21 U3.22 U3.32 USB1. USB1.SH1 USB1.SH2 USB2. USB2.A8 USB2.B8 USB3. USB3.SH1 USB3.SH2

## Polygon pours and split planes (outlines as drawn)
GND on Top Layer "GND_L01_P000" (solid, remove dead copper, pour order 0): 0,36 0,0 29,0 29,7.8 47,7.8 47,0 80,0 80,36
GND on Bottom Layer "GND_L02_P002" (solid, remove dead copper, pour order 2): 0,0.254 28.746,0.254 29,0 29,7.8 47,7.8 47,0 80,0 80,36 0,36

## Keep-outs
Keep-Out Layer:
  the board outline again, w0.254

## Silkscreen, mask and mechanical layers (free items; w line width, h text height)
Top Overlay:
  text "Mouse" at 78.486,23.114 h1.52 r90
  text "Designed By /  YFW@2021212" at 5.715,9.401 h1.52 r90
  text "Keyboard" at 78.486,3.429 h1.52 r90
Mechanical 1:
  lines w0.254: 0,0 0,36 80,36 ; 0,0 0,0 ; 0,0 29,0 29,7.8 47,7.8 47,0 80,0 ; 80,0 80,0 ; 80,0 80,36 ; 80,36 80,36